# EAGLE board BeagleCap (EAGLE 6.4)
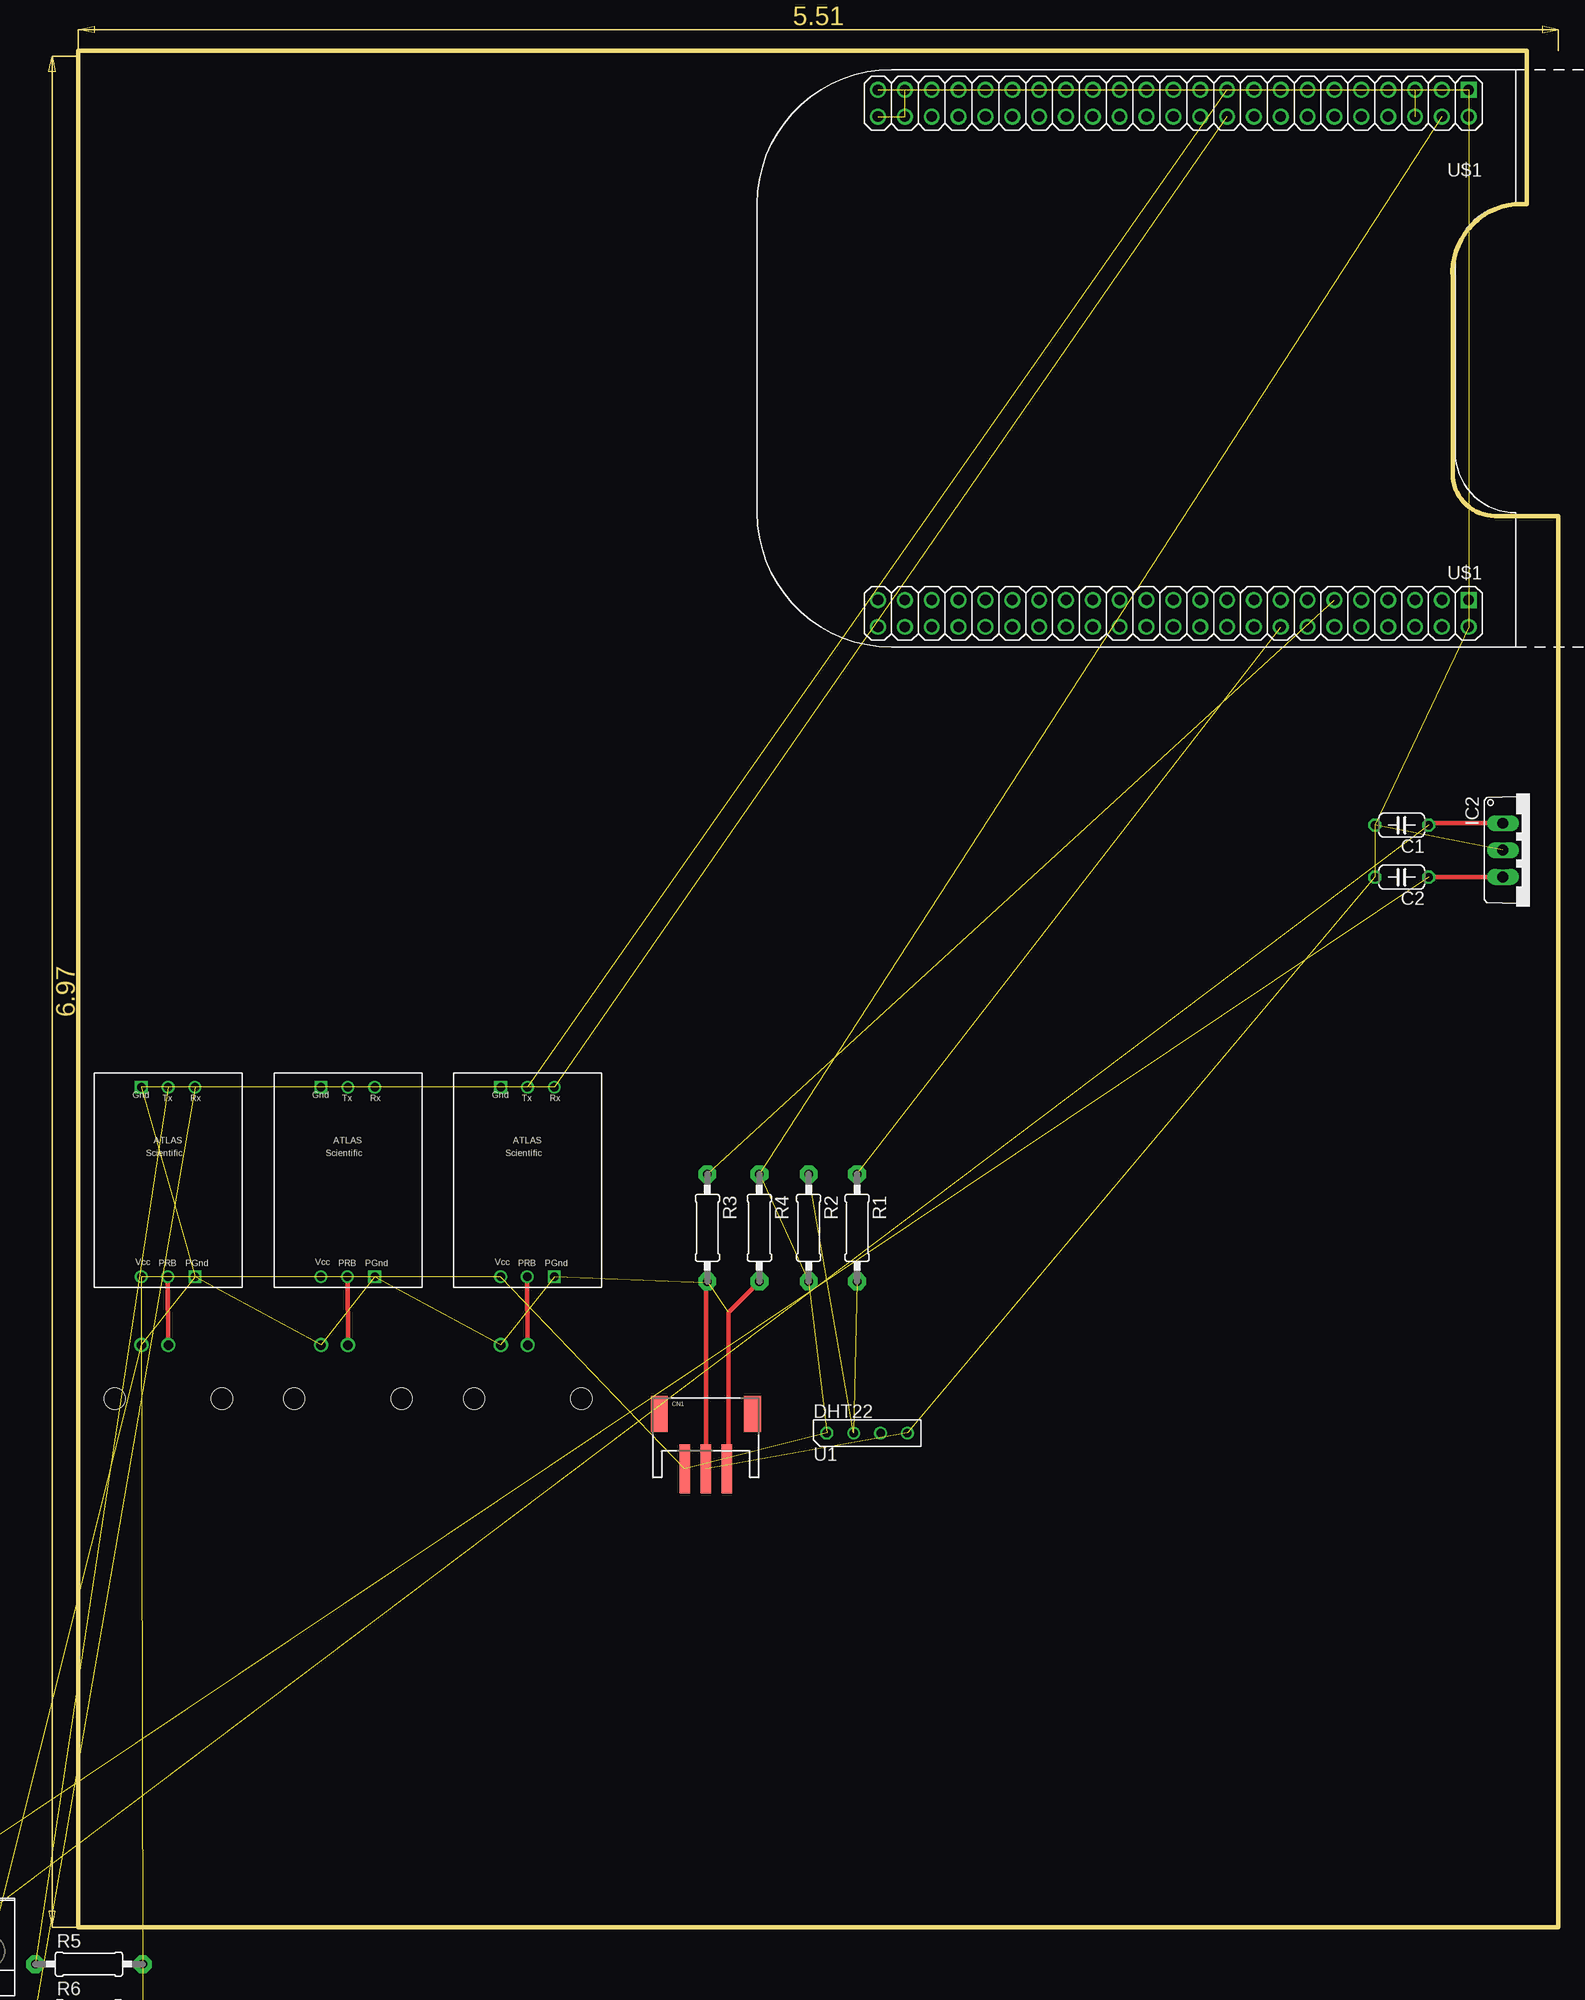
[diagram p0: board, top side]
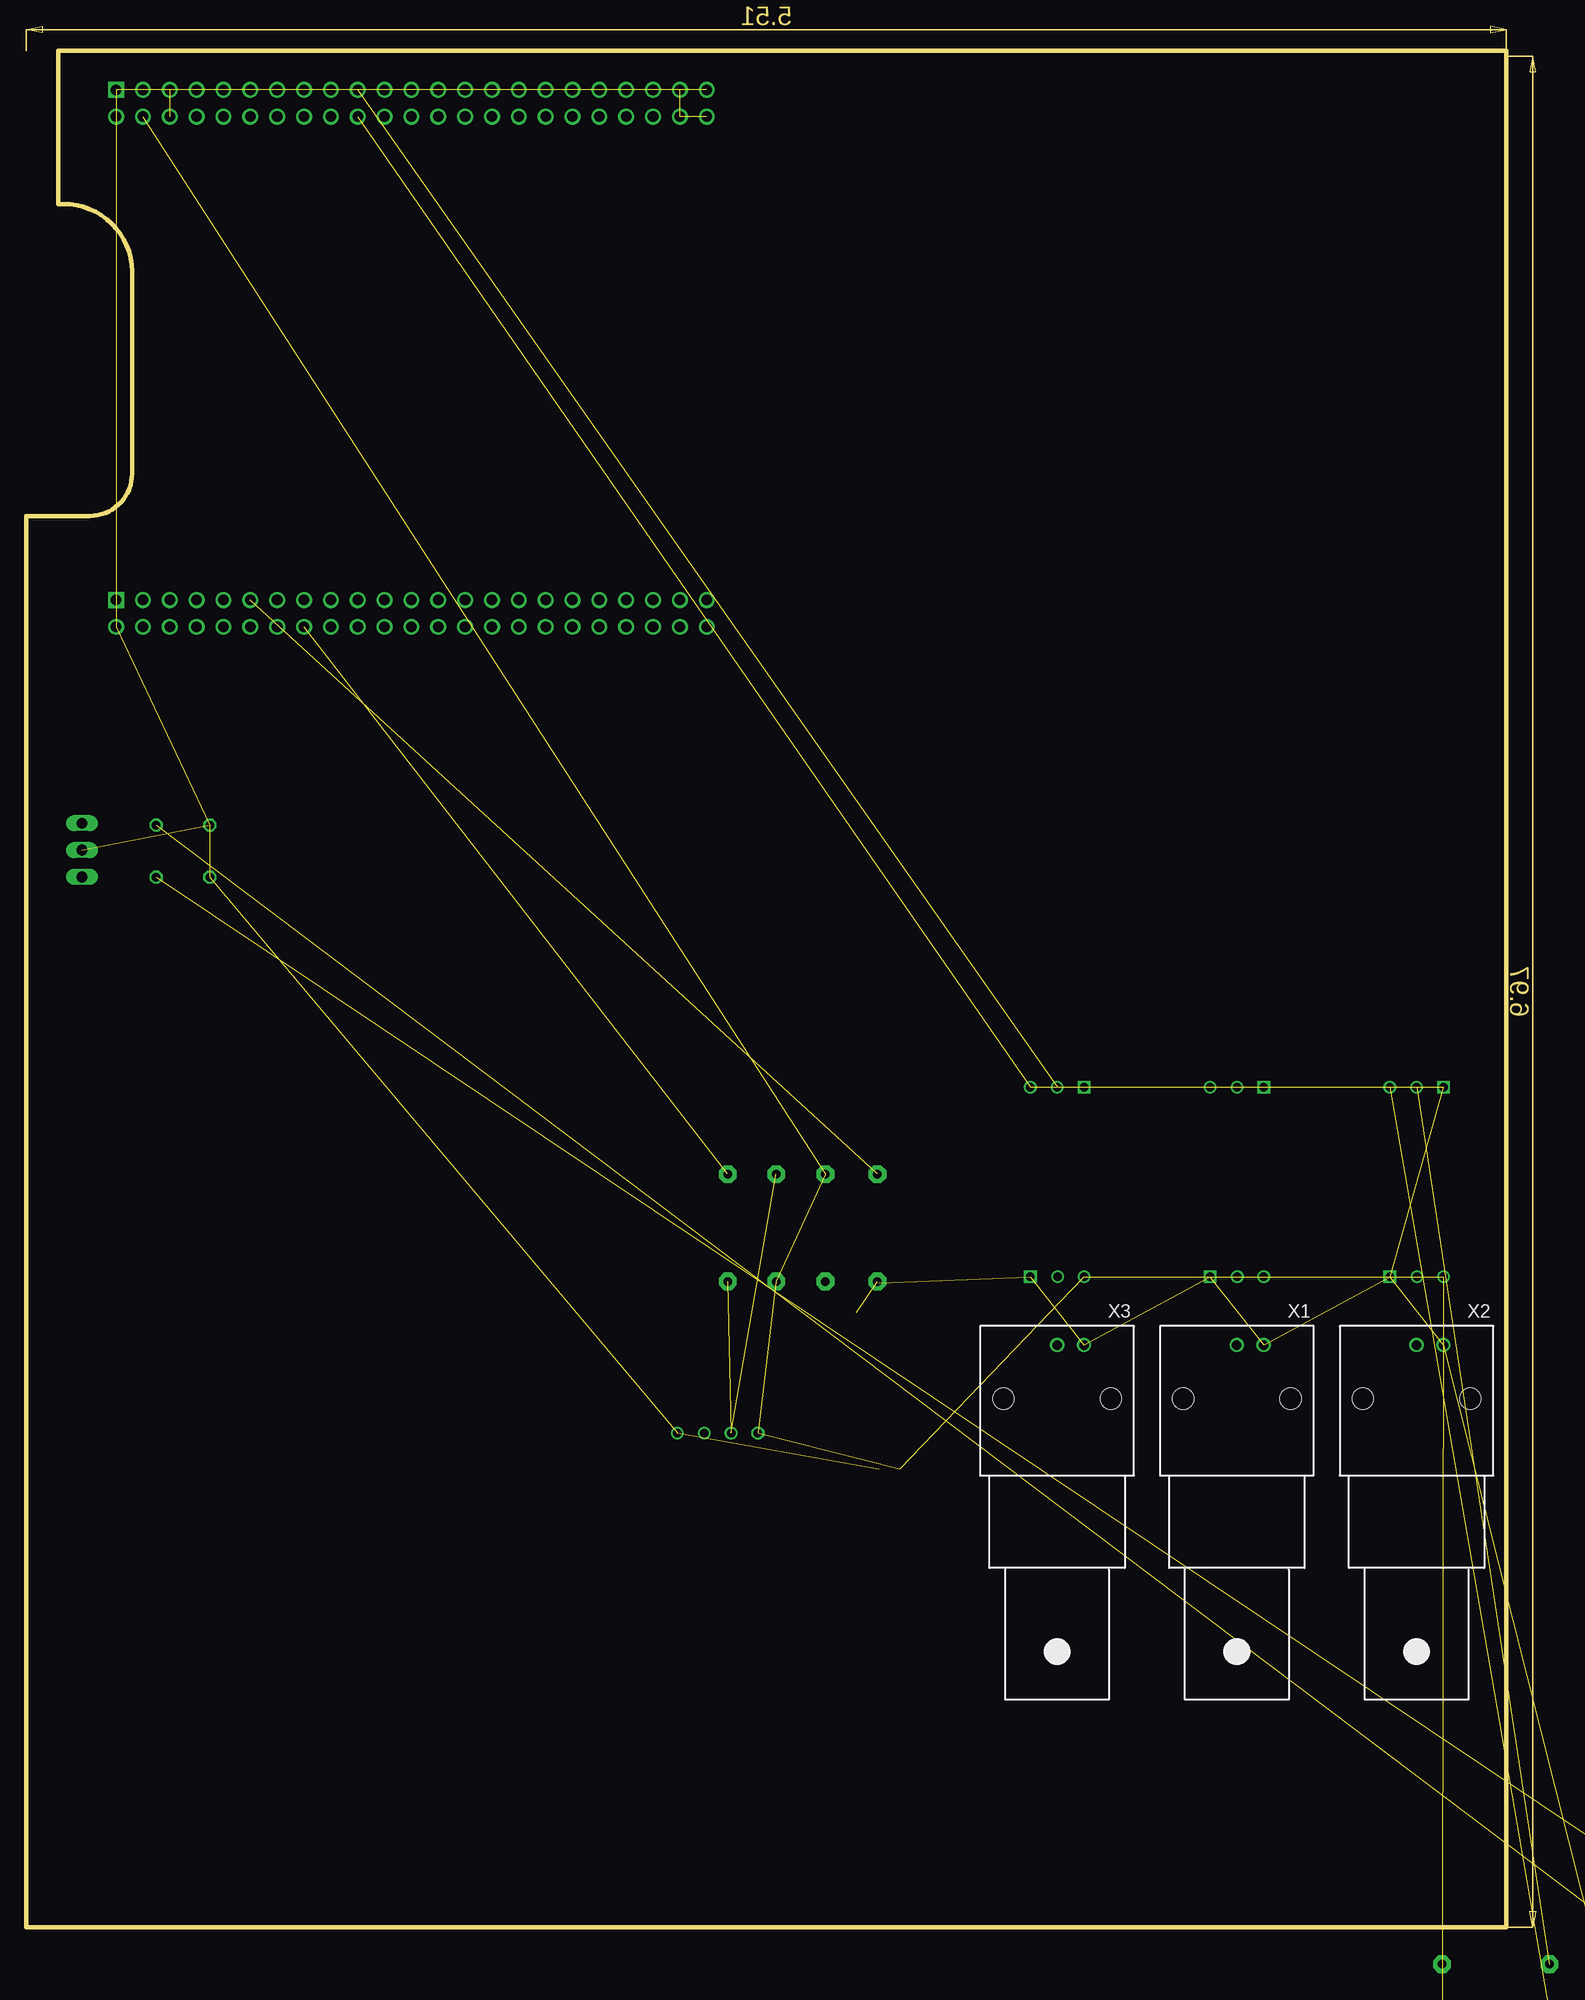
[diagram p1: board, bottom side, seen from below]

Size 140 x 177.5 mm. Coordinates in mm from the lower left corner, seen from the top.
Outline: 0,177.5 137,177.5 137,163 136.5,163 arc94 130,156 130,137.5 arc90 134,133.5 140,133.5 140,0 0,0 0,177.5
Copper layers (1*16): Top 0.0356mm / dielectric 1.5011mm / Bottom 0.0356mm
Design rules "oshpark-2layer": minimum track width 6mil, minimum drill 13mil, track to track 6mil, track to pad 6mil, pad to pad 6mil, via to via 6mil, smd to smd 6mil, copper to edge 15mil, drill to drill 6mil, minimum pad ring 7mil, minimum via ring 7mil, stop-mask expansion 4mil, vias tented up to drill 0mil, thermal gap 10mil

## Footprints (pad centres in the part's own frame; a part is rotated, then mirrored left to right if it is on the bottom)
W237-102 = drill 1.194 long: 1 -2.5,-1.27; 2 2.5,-1.27
C050-024X044 = drill 0.813 octagon: 1 -2.54,0; 2 2.54,0
JSTPH3 = smd 1 x 4.6: 1 -2,-2.7; 2 0,-2.7; 3 2,-2.7 | smd 1.6 x 3.4: NC1 -4.4,2.5; NC2 4.4,2.5
TO220V = drill 1.016 long: 1 -2.54,-2.54; 2 0,-2.54; 3 2.54,-2.54
0207/10 = drill 0.813 pad 1.676 octagon: 1 -5.08,0; 2 5.08,0
AM2302 = drill 0.8: DATA -1.27,0; GND 3.81,0; NULL 1.27,0 | drill 0.8 octagon: VDD -3.81,0
BEAGLEBONE_SHIELD_NO_OUTLINE = drill 1 square: 1 4.445,19.05; 47 52.705,19.05 | drill 1: 2 1.905,19.05; 3 4.445,21.59; 4 1.905,21.59; 5 4.445,24.13; 6 1.905,24.13; 7 4.445,26.67; 8 1.905,26.67; 9 4.445,29.21; 10 1.905,29.21; 11 4.445,31.75; 12 1.905,31.75; 13 4.445,34.29; 14 1.905,34.29; 15 4.445,36.83; 16 1.905,36.83; 17 4.445,39.37; 18 1.905,39.37; 19 4.445,41.91; 20 1.905,41.91; 21 4.445,44.45; 22 1.905,44.45; 23 4.445,46.99; 24 1.905,46.99; 25 4.445,49.53; 26 1.905,49.53; 27 4.445,52.07; 28 1.905,52.07; 29 4.445,54.61; 30 1.905,54.61; 31 4.445,57.15; 32 1.905,57.15; 33 4.445,59.69; 34 1.905,59.69; 35 4.445,62.23; 36 1.905,62.23; 37 4.445,64.77; 38 1.905,64.77; 39 4.445,67.31; 40 1.905,67.31; 41 4.445,69.85; 42 1.905,69.85; 43 4.445,72.39; 44 1.905,72.39; 45 4.445,74.93; 46 1.905,74.93; 48 50.165,19.05; 49 52.705,21.59; 50 50.165,21.59; 51 52.705,24.13; 52 50.165,24.13; 53 52.705,26.67; 54 50.165,26.67; 55 52.705,29.21; 56 50.165,29.21; 57 52.705,31.75; 58 50.165,31.75; 59 52.705,34.29; 60 50.165,34.29; 61 52.705,36.83; 62 50.165,36.83; 63 52.705,39.37; 64 50.165,39.37; 65 52.705,41.91; 66 50.165,41.91; 67 52.705,44.45; 68 50.165,44.45; 69 52.705,46.99; 70 50.165,46.99; 71 52.705,49.53; 72 50.165,49.53; 73 52.705,52.07; 74 50.165,52.07; 75 52.705,54.61; 76 50.165,54.61; 77 52.705,57.15; 78 50.165,57.15; 79 52.705,59.69; 80 50.165,59.69; 81 52.705,62.23; 82 50.165,62.23; 83 52.705,64.77; 84 50.165,64.77; 85 52.705,67.31; 86 50.165,67.31; 87 52.705,69.85; 88 50.165,69.85; 89 52.705,72.39; 90 50.165,72.39; 91 52.705,74.93; 92 50.165,74.93
ATLAS_STAMP = drill 0.8 square: GND 4.445,18.97; PGND 9.525,1.03 | drill 0.8: PRB 6.95,1.03; RX 9.525,18.97; TX 6.985,18.97; VCC 4.445,1.03
AMP_227161 = drill 0.9 pad 1.27: 1 0,-5.08; 2 -2.54,-5.08 | hole 2: -5.08,0; 5.08,0

## Placement (x,y rotation side)
BARREL  [W237-102]  -21.5,-1 0 top  (outside the outline)
BATT  [W237-102]  -11,-1 0 top  (outside the outline)
C1  0.33uF  [C050-024X044]  125.19,104.25 180 top
C2  0.1uf  [C050-024X044]  125.19,99.33 180 top
CN1  DS18B20  [JSTPH3]  59.35,46.05 0 top
IC2  7805TV  [TO220V]  137.29,101.89 270 top
R1  100  [0207/10]  73.66,66.16 270 top
R2  4.7K  [0207/10]  69.08,66.16 270 top
R3  100  [0207/10]  59.5,66.16 270 top
R4  4.7K  [0207/10]  64.42,66.16 270 top
R5  4.7K  [0207/10]  1,-3.5 0 top  (outside the outline)
R6  4.7K  [0207/10]  1,-8 0 top  (outside the outline)
U1  DHT22  [AM2302]  74.61,46.74 0 top
U$1  BEAGLEBONE_NO_OUTLINE  [BEAGLEBONE_SHIELD_NO_OUTLINE]  150.57,121.1 90 top
U$2  ATLAS_STAMP  [ATLAS_STAMP]  18.5,60.5 0 top
U$3  ATLAS_STAMP  [ATLAS_STAMP]  1.5,60.5 0 top
U$4  ATLAS_STAMP  [ATLAS_STAMP]  35.5,60.5 0 top
X1  Conn BNC : pH  [AMP_227161]  25.5,50 180 bottom
X2  Conn BNC : Dissolved Oxygen  [AMP_227161]  8.5,50 180 bottom
X3  Conn BNC : Conductivity  [AMP_227161]  42.5,50 180 bottom

## Library data of the parts
BARREL BATT = con-wago-500; MPN: 237-102; OC_FARNELL: unknown; OC_NEWARK: 70K9898
C1 C2 CN1 R1-R6 = adafruit
IC2 = linear
U1 = RHT03_DHT-22_AM2302; PROD_ID: SEN-10167
U$1-U$4 = LEDscape
X1-X3 = con-coax; MF: TYCO ELECTRONICS; MPN: 1-227161; OC_FARNELL: unknown; OC_NEWARK: 33B3200

## Nets
5V: BARREL.1 C2.1 IC2.3
AIN0: U$1.85
DO_SENSOR: U$3.PRB X2.1
GND: BARREL.2 BATT.2 C1.2 C2.2 CN1.2 IC2.2 U1.GND U$1.1 U$1.2 U$1.47 U$1.48 U$1.89 U$1.90 U$1.91 U$1.92 U$2.GND U$2.PGND U$3.GND U$3.PGND U$4.GND U$4.PGND X1.2 X2.2 X3.2
I2C2_SCL: R5.1 U$1.65 U$2.TX U$3.TX U$4.TX
I2C2_SDA: R6.1 U$1.66 U$2.RX U$3.RX U$4.RX
K_SENSOR: U$4.PRB X3.1
N$3: R1.2 R2.1 U1.DATA
N$4: R3.1 U$1.11
N$5: CN1.3 R3.2 R4.2
N$6: R1.1 U$1.16
PH_SENSOR: U$2.PRB X1.1
SYS_5V: U$1.53
VCC: CN1.1 R2.2 R4.1 R5.2 R6.2 U1.VDD U$1.50 U$2.VCC U$3.VCC U$4.VCC
VDD_3V3EXP: U$1.49
VDD_5V: U$1.51 U$1.52
VIN: BATT.1 C1.1 IC2.1

## Tracks (layer width: path | path; a pad name or v marks a point on that pad's centre or on a via)
5V  (1 unrouted)
  Top 0.406: IC2.3 127.75,99.35 C2.1
DO_SENSOR
  Top 0.406: X2.1 U$3.PRB
GND  (23 unrouted)
  Top 0.406: CN1.2 59.35,60.93
I2C2_SCL  (4 unrouted)
I2C2_SDA  (4 unrouted)
K_SENSOR
  Top 0.406: X3.1 U$4.PRB
N$3  (2 unrouted)
N$4  (1 unrouted)
N$5  (1 unrouted)
  Top 0.406: CN1.3 61.5,43.35 61.5,58.16 R4.2
N$6  (1 unrouted)
PH_SENSOR
  Top 0.406: X1.1 U$2.PRB
VCC  (9 unrouted)
VDD_5V  (1 unrouted)
VIN  (1 unrouted)
  Top 0.406: IC2.1 127.91,104.43 C1.1